# Altium PCB EE311_Charger_PCB.PcbDoc
Units mm, origin at the board's own origin, x right, y up, seen from the top; angles counter-clockwise.
Board outline 68 x 69 mm, 2 copper layers (Top Layer, Bottom Layer); 46 components, 17 nets, 117 pads, 17 vias.
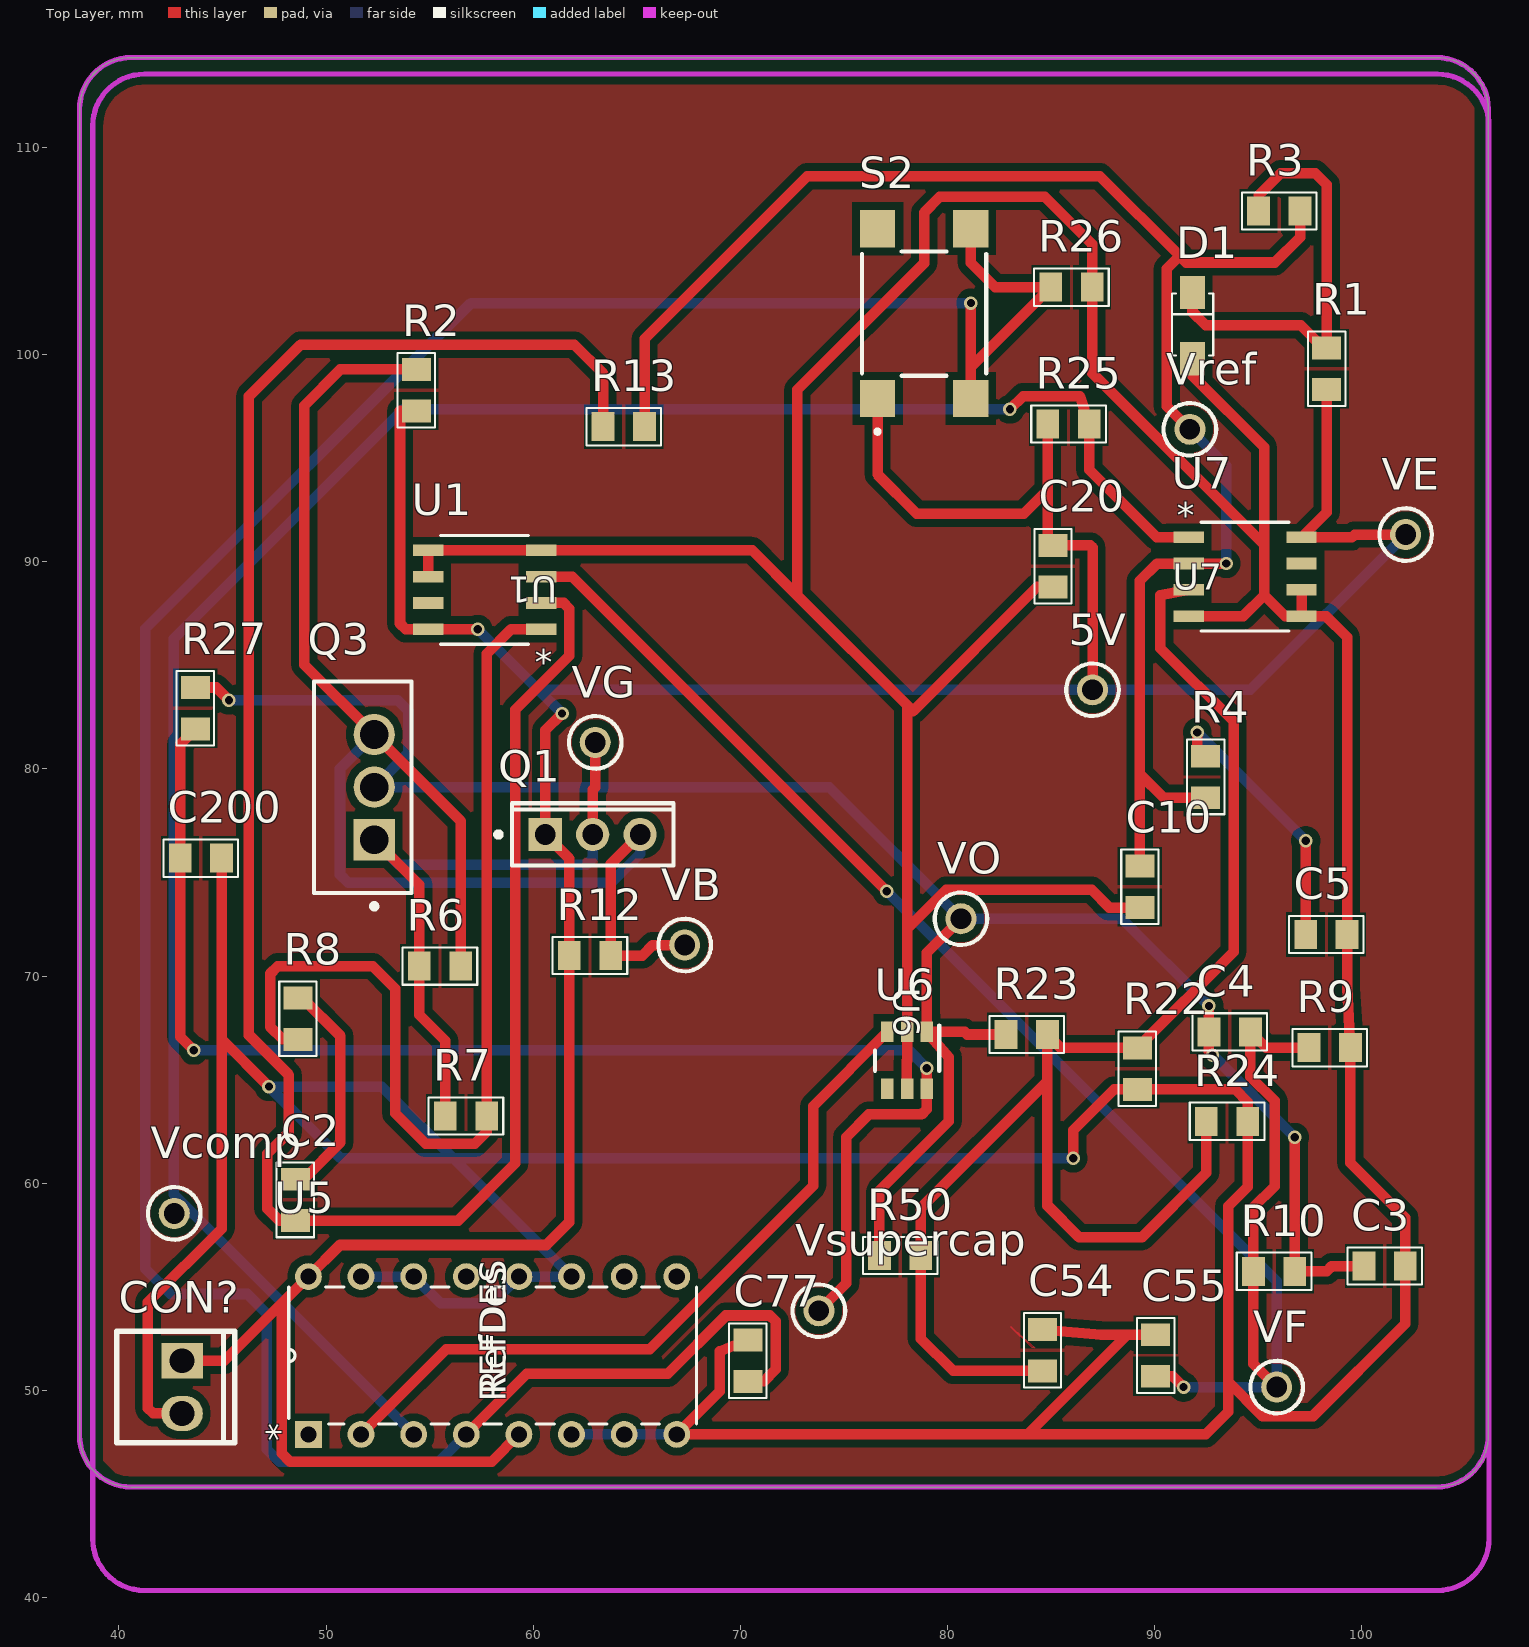
[diagram p0: Top Layer view]
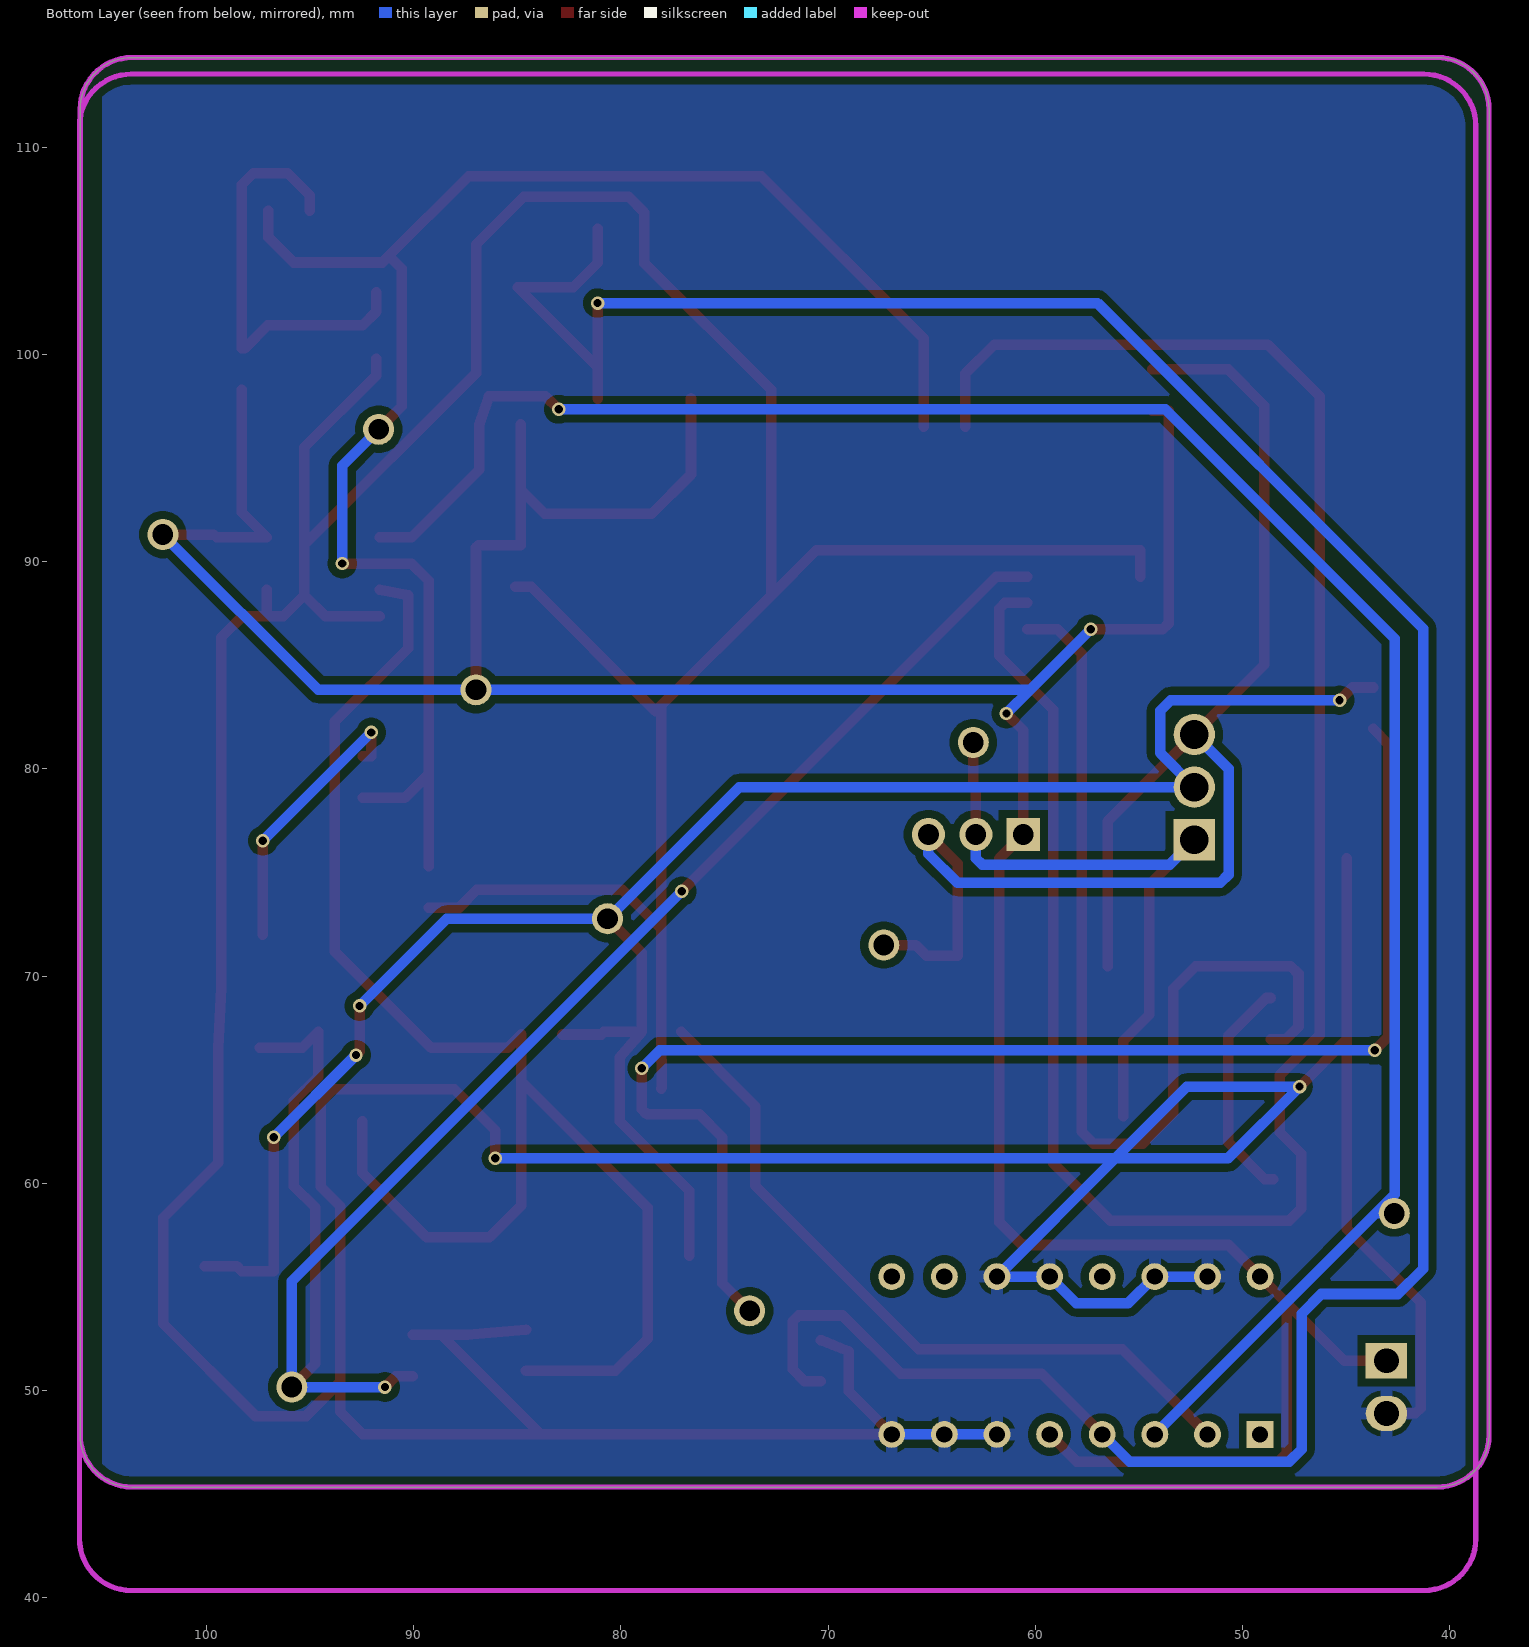
[diagram p1: Bottom Layer view, seen from below]

## Layer stack, top to bottom
Top Solder: solder mask 0.0102, Solder Resist, Dk 3.5
Top Layer: signal copper 0.0356
Dielectric 1: dielectric 0.32, FR-4, Dk 4.8
Bottom Layer: signal copper 0.0356
Bottom Solder: solder mask 0.0102, Solder Resist, Dk 3.5

## Board outline
38.1,47.839 38.1,111.839 cw(c40.6,111.839) 40.6,114.339 103.6,114.339 cw(c103.6,111.839) 106.1,111.839 106.1,47.839 cw(c103.6,47.839) 103.6,45.339 40.6,45.339 cw(c40.6,47.839)

## Design rules (kind name [scope] priority, off if disabled: settings)
BoardOutlineClearance [All] p1: gap=0.3 ignorepadtopadclearanceinfootprint=FALSE except(0.4: Arc-SplitBarrior Arc-SplitContinuation Track-SplitBarrior Track-SplitContinuation SMDPad-SplitBarrior SMDPad-SplitContinuation THPad-SplitBarrior THPad-SplitContinuation Via-SplitBarrior Via-SplitContinuation Fill-SplitBarrior Fill-SplitContinuation Poly-SplitBarrior Poly-SplitContinuation Region-SplitBarrior Region-SplitContinuation Text-SplitBarrior Text-SplitContinuation)
Clearance [All] p1: gap=0.381 ignorepadtopadclearanceinfootprint=TRUE
Height [All] p1: minheight=0 maxheight=50 prefheight=12.7
HoleSize [All] p1: absolutevalues=TRUE maxlimit=12 minlimit=0.25 maxpercent=80.000 minpercent=20.000
MinimumAnnularRing [All] p1: minimumring=0.13
MinimumSolderMaskSliver [All] p1: minsoldermaskwidth=0.1
PolygonConnect PolygonConnect_RShunt [InComponent('R5')] p1: connectstyle=Direct reliefconductorwidth=0.508 reliefentries=4 polygonreliefangle="90 Angle" airgapwidth=0.254
PolygonConnect [All] p2: connectstyle=Relief reliefconductorwidth=0.6 reliefentries=4 polygonreliefangle="90 Angle" airgapwidth=0.254
RoutingCorners [All] p1: cornerstyle=Round minsetback=2.54 maxsetback=2.54
RoutingVias [All] p1: holewidth=0.4 width=0.65 viastyle="Through Hole" minholewidth=0.25 minwidth=0.4 maxholewidth=1 maxwidth=2
SilkToSilkClearance [All] p1: silktosilkclearance=0.1
SilkToSolderMaskClearance [IsPad] p1: minsilkscreentomaskgap=0.1 clearancetoexposedcopper=TRUE
SolderMaskExpansion [All] p1: expansion=0.102 istentingtop=FALSE
SupplyNets "Schematic Supply Nets_9" [InNet('vbin')] p1: voltage=0.000
SupplyNets "Schematic Supply Nets_8" [InNet('VOUT')] p2: voltage=0.000
SupplyNets "Schematic Supply Nets_5" [InNet('vbout')] p3: voltage=0.000
SupplyNets "Schematic Supply Nets_4" [InNet('NEGATIVE')] p4: voltage=0.000
SupplyNets "Schematic Supply Nets_2" [InNet('opampOUT')] p5: voltage=0.000
SupplyNets "Schematic Supply Nets_1" [InNet('POSITIVE')] p6: voltage=0.000
SupplyNets "Schematic Supply Nets_6" [InNet('vref')] p7: voltage=0.000
SupplyNets "Schematic Supply Nets_3" [InNet('GND')] p8: voltage=0.000
SupplyNets "Schematic Supply Nets" [InNet('5V')] p9: voltage=0.000
Width [All] p1: maxlimit=10.16 minlimit=0.127 preferedwidth=0.508
24 further rules are at their usual default settings.

## Components (designator, comment, footprint, x,y, rotation, side; value= is the part's Value field where it differs from the comment)
5V "5003" TP_TH 86.995,83.82 r0 top
C2 "0.0000000033" "0805 CAP" 48.514,59.198 r90 top
C3 "0.0001" "0805 CAP" 101.092,56.007 r0 top
C4 "0.00000033" "0805 CAP" 93.615,67.31 r0 top
C5 "1100" "0805 RES" 98.282,72.009 r0 top
C10 "0.000001" "0805 CAP" 89.281,74.311 r270 top
C20 "0.000001" "0805 CAP" 85.09,89.789 r270 top
C54 "0.0001" "0805 CAP" 84.582,51.943 r90 top
C55 "0.0001" "0805 CAP" 90.043,51.689 r90 top
C77 "0.0001" "0805 CAP" 70.358,51.435 r90 top
C200 "0.0001" "0805 CAP" 43.958,75.692 r0 top
CON? "HDR2X1" HDR2X1_2P54 43.053,51.435 r0 top
D1 "BZT52H-B4V7" SOD123 91.821,101.447 r90 top
Q1 "BD140" ONSC-TO-225-3-77-09 62.869,76.835 r90 top
Q3 "IRF4905" IFX-PG-TO220-3-904-1 52.324,79.121 r90 top
R1 "330" "0805 RES" 98.298,99.314 r270 top
R2 "2.2" "0805 RES" 54.356,98.282 r90 top
R3 "3900" "0805 RES" 96.012,106.934 r0 top
R4 "3300" "0805 RES" 92.456,79.613 r90 top
R6 "100000" "0805 RES" 55.499,70.485 r180 top
R7 "1200" "0805 RES" 56.753,63.246 r0 top
R8 "10000" "0805 RES" 48.641,67.945 r90 top
R9 "1000" "0805 RES" 98.441,66.548 r180 top
R10 "1000" "0805 RES" 95.758,55.753 r0 top
R12 "1.8" "0805 RES" 62.738,70.993 r0 top
R13 "1200" "0805 RES" 64.373,96.52 r0 top
R22 "1000" "0805 RES" 89.154,65.532 r90 top
R23 "1000" "0805 RES" 83.82,67.183 r0 top
R24 "1000" "0805 RES" 93.488,62.992 r180 top
R25 "1000" "0805 RES" 85.836,96.647 r180 top
R26 "1000" "0805 RES" 85.979,103.251 r180 top
R27 "2" "0805 RES" 43.688,82.931 r270 top
R50 "1000" "0805 RES" 77.708,56.515 r180 top
S2 "SWT0315-065025GSA_REVA" SW_SWT0315-065025GSA_REVA 78.867,101.981 r90 top
U1 "TLV9162IDR" SOIC8_D_TEX 57.658,88.646 r180 top
U5 "CD4043BE" N16 66.929,55.499 r90 top
U6 "TPS22917DBVR" DBV0006_N 78.044,65.935 r270 top
U7 "TLV9162IDR" SOIC8_D_TEX 94.361,89.281 r0 top
VB "5003" TP_TH 67.31,71.501 r0 top
Vcomp "5003" TP_TH 42.672,58.547 r90 top
VE "5003" TP_TH 102.108,91.313 r0 top
VF "5003" TP_TH 95.885,50.165 r0 top
VG "5003" TP_TH 62.992,81.28 r0 top
VO "5003" TP_TH 80.645,72.771 r0 top
Vref "5003" TP_TH 91.694,96.393 r90 top
Vsupercap "5003" TP_TH 73.787,53.848 r90 top

## Footprints (in the part's own frame and the unit in brackets; to place one, negate y for a bottom-side part, rotate by r counter-clockwise, add the part's x,y. Pads: shape width x height; smd on the part's side, far side on the other; paste and mask are expansions set on the pad)
"0805 CAP" [mm] "http://www.digikey.co.nz/Web%20Export/Supplier%20Content/Vishay_8026/PDF/VishayBeyschlag_SolderPad.pdf?redirected=1 with dimension G modified by +0.25mm"
  rect 1.1x1.4 smd: 1(-1,0) 2(1,0)
  silkscreen extent -1.8,-0.9 1.8,0.9, body extent -1.04,-0.66 1.04,0.66, height 0.61
"0805 RES" [mm] "http://www.digikey.co.nz/Web%20Export/Supplier%20Content/Vishay_8026/PDF/VishayBeyschlag_SolderPad.pdf?redirected=1 with dimension G modified by +0.25mm"
  rect 1.1x1.4 smd: 1(-1,0) 2(1,0)
  silkscreen extent -1.8,-0.9 1.8,0.9, body extent -1.04,-0.66 1.04,0.66, height 0.61
DBV0006_N [mm]
  rect 1x0.6 smd paste+0 mask+0: 1(-1.375,0.95) 2(-1.375,0) 3(-1.375,-0.95) 4(1.375,-0.95) 5(1.375,0) 6(1.375,0.95)
  silkscreen extent -1.67,-1.55 0.5,1.55
HDR2X1_2P54 [mm]
  rect 2x1.7 hole 1.2: 1(0,0)
  oval 2x1.7 hole 1.2: 2(0,-2.54)
  silkscreen extent -3.16,-3.96 2.54,1.42, body extent -3.3,-3.64 3.18,1.44, height 10.09
IFX-PG-TO220-3-904-1 [mm] "TO,flange mount,2.54 mm pitch, 3 pin, 10.16 mm L X 4.57 mm W X 20.56 mm H body"
  rect 1.99x1.99 hole 1.39 paste-2539.97 mask+0: 1(-2.54,0)
  round 1.99 hole 1.39 paste-2539.97 mask+0: 2(0,0) 3(2.54,0)
  silkscreen extent -5.87,-1.8 5.1,2.9, body extent -5.16,-1.72 5.16,2.86, height 19.84
N16 [mil]
  rect 51x51 / inner round 60 / far side rect 51x51 hole 31 paste-99999 mask-25.5: 1(-300,700)
  round 51 / inner round 60 / far side round 51 hole 31 paste-99999 mask-25.5: 2(-300,600) 3(-300,500) 4(-300,400) 5(-300,300) 6(-300,200) 7(-300,100) 8(-300,0) 9(0,0) 10(0,100) 11(0,200) 12(0,300) 13(0,400) 14(0,500) 15(0,600) 16(0,700)
  silkscreen extent -280,-38 -20,738, body extent -310,-30 10,745, height 205
ONSC-TO-225-3-77-09 [mm] "FM, 3-Leads, Body 7.8x3mm, Pitch 2.29mm"
  rect 1.6x1.6 hole 1: 1(0,2.29)
  round 1.6 hole 1: 2(0,0) 3(0,-2.29)
  silkscreen extent -1.49,-3.9 1.51,4.67, body extent -1.49,-3.9 1.51,3.9, height 13.64
SOD123 [mm] "SOD-123; 2 Leads; Body 2.7 x 1.6 mm, (LxW)"
  rect 1.6x1.2 smd: 1(-1.65,0) 2(1.55,0)
  silkscreen extent -1.5,-1 1.5,1, body extent -1.8,-0.86 1.8,0.86, height 1.21
SOIC8_D_TEX [mil]
  rect 57.5x22 smd paste+0 mask+0: 1(-107.25,75) 2(-107.25,25) 3(-107.25,-25) 4(-107.25,-75) 5(107.25,-75) 6(107.25,-25) 7(107.25,25) 8(107.25,75)
  silkscreen extent -84,-104 84,104, body extent -122,-99 122,99, height 69
SW_SWT0315-065025GSA_REVA [mm]
  rect 1.8x1.7 smd paste+0 mask+0.102: 1(-4.1,2.25) 2(4.1,2.25) 3(-4.1,-2.25) 4(4.1,-2.25)
  silkscreen extent -5.8,-3 3,3
TP_TH [mm] "Test Point, Through Hole, Dia 2.54mm"
  round 1.5 hole 1: 1(0,0)
  silkscreen extent -1.27,-1.27 1.27,1.27, body extent -1.27,-1.27 1.27,1.27, height 4.57

## Part data
5V VB Vcomp VE VF VG VO Vref Vsupercap: library part TestPoint, "Test Point, Orange, 1-Pin THD, RoHS", Forward Current="3 A", Forward Voltage="1.08 V", Max Operating Temperature="150 degC", Max Surge Current="80 A", Min Operating Temperature="-65 degC", Package Quantity=500, Peak Reverse Current="600 uA", ComponentLink1Description="Manufacturer URL", ComponentLink1URL=http://www.keyelco.com/, ComponentLink2Description=Datasheet, ComponentLink2URL=http://keyelco.com/userAssets/file/M65p56.pdf, DatasheetVersion=Jun-15, Diameter="5.3 mm", Height="0.25 inch", Length="9.5 mm", Mount="Through Hole", PackageDescription="1-Pin Through Hole Device, Dia 2.54 mm", PackageReference=5003, Packaging=Bulk, Pins=2, Radiation Hardening=No, REACH SVHC="No SVHC", RoHSCompliant=true, Weight="0.01 lb", Width="0.25 inch"
C2 C3 C4 C10 C20 C54 C55 C77 C200: library part CerCap_SMT_0805, "SMT ceramic capacitor 0805 size"
C5 R1 R2 R3 R4 R6 R7 R8 R9 R10 R12 R13 R22 R23 R24 R25 R26 R27 R50: library part Res_SMT_0805, "0805 resistor", ComponentLink1Description=https://nz.mouser.com/datasheet/2/315/AOA0000C304-1149620.pdf, LatestRevisionDate=17-Jul-2002, LatestRevisionNote="Re-released for DXP Platform.", PackageReference=AXIAL-0.4, Published=8-Jun-2000, Publisher="Altium Limited"
CON?: library part CMP-004-000000-7, "Header 2X1", Component Type=Connectors, Design Item ID=HDR2X1, Source=CommonSymbols_V1.SchLib
D1: library part Zener_SMT_SOD123, "SMT zener diode with SOD123 package", Manufacturer="Nexperia USA Inc.", Manufacturer Part Number=BZT52H-B4V7,115, Operating Temperature="-65°C ~ 150°C (TA)", Package / Case=SOD-123F, Supplier Part Number 1=1727-1611-1-ND, Tolerance=±2%, Category="Discrete Semiconductor Products", ComponentLink1Description=https://assets.nexperia.com/documents/data-sheet/BZT52H_SER.pdf, ComponentLink1URL=https://assets.nexperia.com/documents/data-sheet/BZT52H_SER.pdf, Mounting Type="Surface Mount", Packaging="Cut Tape (CT)", Part Status=Active, Pricing 1="1=0.51, 10=0.408, 100=0.2164, 500=0.14232, 1000=0.09678 (NZD)", RoHS="RoHS Compliant", Stock 1=0, Supplier 1=Digi-Key, Supplier Device Package=SOD-123F
Q1: library part CMP-1048-00039-1, "Plastic Medium-Power Silicon PNP Transistor, 3-Pin TO-225, Bulk Box", Manufacturer="On Semiconductor", ComponentLink1Description="Manufacturer URL", ComponentLink1URL=http://www.onsemi.com/, ComponentLink2Description=Datasheet, ComponentLink2URL=http://www.onsemi.com/pub_link/Collateral/BD136-D.PDF, ComponentLink3Description="Package Specification", ComponentLink3URL=http://www.onsemi.com/pub_link/Collateral/77-09.PDF, DatasheetVersion="Rev. 15", IC Continuous (A)=1.5, Mounting Technology="Through Hole", PackageDescription="3-Pin Flange Mount, Vertical Straight Lead, Body 7.6 x 2.7 mm, Pitch 2.29 mm", PackageReference=TO-225-3-77-09, PackageVersion="Rev. AC, 12/2013", Packing="Bulk Box", PartNumber=BD140, Polarity=PNP, RoHS=FALSE
Q3: "OptiMOS - P2 Power-Transistor, P-channel-Enhancement mode, VDS -30V", Manufacturer="Infineon Technologies", Manufacturer Order NumberManufacturer Order Number=IRF4905, PackageReference=PG-TO220-3-904
S2: "6mm x 6mm Gull Wing Tactile Switch", Package=None, Check_prices=https://www.snapeda.com/parts/SWT0315-065025GSA/Global+Connector+Technology/view-part/?ref=eda, MF="Global Connector Technology", MP=SWT0315-065025GSA, SnapEDA_Link=https://www.snapeda.com/parts/SWT0315-065025GSA/Global+Connector+Technology/view-part/?ref=snap
U1 U7: "Dual, 16V, 11MHz, rail-to-rail input and output low-offset-voltage low-noise operational amplifier 8-SOIC -40 to 125", Manufacturer_Name="Texas Instruments", Copyright="Copyright (C) 2026 Ultra Librarian. All rights reserved.", Datasheet=https://www.ti.com/lit/gpn/tlv9162, Manufacturer_Part_Number=TLV9162IDR, RefDes=RefDes, Type=Type
U5: "CMOS Quad NOR R/S Latch with 3-State Outputs 16-PDIP -55 to 125", Manufacturer_Name="Texas Instruments", Copyright="Copyright (C) 2025 Ultra Librarian. All rights reserved.", Manufacturer_Part_Number=CD4043BE, RefDes=RefDes, Type=Type
U6: "5.5-V, 2-A, 80-mÎ© , 10-nA leakage load switch adj. rise time and adj output discharge 6-SOT-23 -40 to 125", Manufacturer_Name="Texas Instruments", Copyright="Copyright (C) 2026 Ultra Librarian. All rights reserved.", Manufacturer_Part_Number=TPS22917DBVR, RefDes=RefDes, Type=TYPE

## Via types
v1: diameter 0.65, hole 0.4, Top Layer to Bottom Layer, 17 vias

## Nets (pads, with @x,y where several pads share a name; then routed paths per layer and width w, separated by ;. In a path a pad name is that pad's centre, name@x,y a point inside that pad or via, vN(x,y) a via of type N, cw(c..) or ccw(c..) an arc to the next point about the centre after c; other vN are vias at no path point)
5V: 5V.1 C20.1 CON?.1 Q1.1 R1.2 R2.1 R12.1 R25.2 S2.1 U1.8 U5.5 U5.16 U7.8 VE.1 | length 172.7
  Top Layer w0.508: CON?.1 45.085,51.435 47.854,54.204 ; R2.1 53.569,97.282 53.569,87.02 53.848,86.741 U1.8 v1(57.328,86.741) ; U5.5 57.988,46.558 48.26,46.558 47.854,46.965 47.854,54.204 ; v1(61.392,82.677) 60.579,81.864 Q1.1 61.738,75.676 R12.1 61.738,58.131 60.63,57.023 50.673,57.023 U5.16 47.854,54.204 ; S2.1 76.617,94.214 78.518,92.313 83.677,92.313 84.836,93.472 ; R25.2 84.836,93.472 ; 5V.1 86.995,90.687 86.893,90.789 C20.1 84.836,90.789 84.836,93.472 ; R1.2 98.298,92.399 U7.8 99.517,91.186 99.644,91.313 VE.1
  Bottom Layer w0.508: v1(57.328,86.741) 60.249,83.82 ; v1(61.392,82.677) 60.249,83.82 ; VE.1 94.615,83.82 5V.1 60.249,83.82
GND: C3.2 C5.2 C10.2 C20.2 C54.2 C55.2 C77.2 C200.2 CON?.2 D1.1 R9.1 R22.1 R24.1 R26.1 U1.4 U1.5 U1.6 U5.6 U5.7 U5.8 U5.11 U5.12 U5.14 U5.15 U6.2 U6.5 U7.4 U7.5 U7.6 | length 364.8
  Top Layer w0.508: CON?.2 41.656,48.895 41.402,49.149 41.402,54.254 44.958,57.81 44.958,66.954 ; C200.2 44.958,66.954 ; v1(47.244,64.668) 44.958,66.954 ; U1.6 U1.5 U1.4 70.568,90.551 72.746,88.373 ; C77.2 69.012,51.892 69.012,49.962 U5.8 83.861,47.879 ; U6.5 78.044,64.597 78.034,64.607 78.034,65.913 78.044,65.923 U6.2 78.044,72.278 ; C54.2 87.427,52.689 88.671,52.689 ; C20.2 84.328,88.789 78.329,82.79 ; v1(86.065,61.214) 86.065,62.56 88.036,64.532 R22.1 93.878,64.532 94.488,63.922 R24.1 94.488,59.842 93.548,58.903 93.548,50.419 ; C10.2 87.808,73.311 86.956,74.163 79.929,74.163 78.044,72.278 ; C55.2 88.671,52.689 ; U7.4 94.259,87.376 95.275,88.392 ; D1.1 91.821,98.984 95.275,95.529 95.275,90.814 ; U7.6 U7.5 ; 72.746,88.373 78.044,83.075 ; 72.746,88.373 72.746,98.298 78.867,104.419 78.867,106.858 79.629,107.62 84.693,107.62 86.979,105.334 R26.1 86.979,99.111 95.275,90.814 ; 78.044,72.278 78.044,82.79 ; 78.044,82.79 78.044,83.075 ; 78.044,82.79 78.329,82.79 ; 78.044,83.075 78.329,82.79 ; 83.861,47.879 92.456,47.879 93.548,48.971 93.548,50.419 ; 83.861,47.879 88.671,52.689 ; 93.548,50.419 95.199,48.768 97.638,48.768 102.092,53.222 C3.2 102.092,58.344 99.441,60.995 R9.1 99.282,69.425 C5.2 99.282,86.36 98.266,87.376 U7.5 ; 95.275,88.392 95.275,90.814 ; 95.275,88.392 96.291,87.376 U7.5
  Bottom Layer w0.508: U5.15 U5.14 55.524,54.204 58.014,54.204 U5.12 U5.11 56.134,61.214 ; U5.6 U5.7 U5.8 ; v1(86.065,61.214) 56.134,61.214 ; 56.134,61.214 50.698,61.214 v1(47.244,64.668) 52.68,64.668 56.134,61.214
NEGATIVE: C2.1 R13.1 U1.2 | length 104.4
  Top Layer w0.508: U1.2 61.468,88.011 61.747,87.732 61.747,85.471 59.131,82.855 59.131,60.96 56.369,58.198 C2.1 47.752,58.198 47.168,58.782 47.168,61.417 48.209,62.459 48.209,65.227 46.279,67.158 46.279,97.993 48.768,100.482 61.976,100.482 63.373,99.085 R13.1
NetC2_2: C2.2 R8.2 | length 10.9
  Top Layer w0.508: C2.2 48.917,60.198 50.695,61.976 50.695,67.11 48.86,68.945 R8.2
NetC5_1: C5.1 R4.2 | length 13.5
  Top Layer w0.508: v1(92.05,81.763) 92.05,80.613 R4.2 ; C5.1 v1(97.282,76.53)
  Bottom Layer w0.508: v1(92.05,81.763) v1(97.282,76.53)
NetC77_1: C77.1 R26.2 S2.3 S2.4 U5.4 | length 138.4
  Top Layer w0.508: U5.4 59.69,50.8 66.483,50.8 69.303,53.62 71.424,53.62 71.704,53.34 71.704,51.019 71.12,50.435 C77.1 ; S2.3 81.117,99.389 ; S2.4 81.117,104.43 82.296,103.251 R26.2 81.117,99.389 ; v1(81.128,102.489) 81.117,102.478 81.117,99.389
  Bottom Layer w0.508: U5.4 55.448,46.558 47.752,46.558 47.142,47.168 47.142,53.708 46.194,54.657 42.498,54.657 41.275,55.88 41.275,86.766 56.998,102.489 v1(81.128,102.489)
NetC200_1: C200.1 R27.2 U6.6 Vsupercap.1 | length 67.2
  Top Layer w0.508: v1(43.616,66.417) 42.958,67.075 C200.1 42.958,81.201 R27.2 ; Vsupercap.1 75.108,55.169 75.108,62.23 76.2,63.322 78.74,63.322 78.994,63.576 U6.6 v1(78.994,65.557)
  Bottom Layer w0.508: v1(43.616,66.417) 78.135,66.417 v1(78.994,65.557)
NetD1_2: D1.2 R1.1 R3.1 | length 20.8
  Top Layer w0.508: D1.2 91.821,102.057 92.456,101.422 97.037,101.422 98.146,100.314 R1.1 98.298,108.204 97.739,108.763 96.079,108.763 95.012,107.696 R3.1
NetQ1_2: Q1.2 Q3.1 R6.2 R7.1 VG.1 | length 31.6
  Top Layer w0.508: Q3.1 54.499,74.406 R6.2 54.499,68.132 55.753,66.878 R7.1 ; Q1.2 62.869,78.994 62.992,79.117 VG.1
  Bottom Layer w0.508: Q3.1 53.518,75.387 62.564,75.387 62.869,75.692 Q1.2
NetQ1_3: Q1.3 Q3.3 R2.2 R6.1 R12.2 VB.1 | length 70.1
  Top Layer w0.508: R2.2 50.692,99.282 48.946,97.536 48.946,85.039 Q3.3 56.499,77.486 R6.1 ; Q1.3 63.738,75.414 R12.2 65.253,70.993 65.761,71.501 VB.1
  Bottom Layer w0.508: Q3.3 50.673,80.01 50.673,74.905 51.079,74.498 63.754,74.498 65.159,75.903 Q1.3
NetU5_2: U5.2 U6.3 | length 35.7
  Top Layer w0.508: U5.2 55.804,51.994 65.619,51.994 73.508,59.883 73.508,63.724 U6.3
opampOUT: R7.2 R8.1 U1.1 | length 48.3
  Top Layer w0.508: R8.1 47.914,66.945 47.295,67.564 47.295,70.104 47.676,70.485 52.248,70.485 53.34,69.393 53.34,63.373 54.813,61.9 57.169,61.9 57.753,62.484 R7.2 57.753,85.566 58.928,86.741 U1.1
POSITIVE: C4.2 C55.1 R9.2 R10.1 U1.3 VF.1 | length 82.4
  Top Layer w0.508: U1.3 61.874,89.281 v1(77.064,74.092) ; C55.1 90.865,50.689 v1(91.389,50.165) ; VF.1 94.758,51.292 R10.1 94.758,58.842 95.783,59.868 95.783,63.983 94.615,65.151 C4.2 95.377,66.548 R9.2
  Bottom Layer w0.508: v1(77.064,74.092) 95.885,55.27 VF.1 v1(91.389,50.165)
vbin: C54.1 R22.2 R23.2 R24.2 R50.1 U7.3 | length 73
  Top Layer w0.508: C54.1 80.264,50.943 78.708,52.499 R50.1 78.708,58.81 84.82,64.922 ; U7.3 90.272,88.392 90.272,85.827 93.802,82.296 93.802,71.18 R22.2 85.471,66.532 R23.2 84.82,64.922 ; R24.2 92.488,60.509 89.383,57.404 86.344,57.404 84.82,58.928 84.82,64.922
vbout: R25.1 U5.3 U7.1 Vcomp.1 | length 102.4
  Top Layer w0.508: v1(83.007,97.358) 83.642,97.993 86.379,97.993 R25.1 86.836,94.444 90.094,91.186 U7.1
  Bottom Layer w0.508: Vcomp.1 43.561,58.547 ; U5.3 43.561,58.547 ; v1(83.007,97.358) 53.721,97.358 42.647,86.284 42.647,59.461 43.561,58.547
VOUT: C3.1 C4.1 Q3.2 R10.2 R23.1 R27.1 R50.2 U6.1 VO.1 | length 100.4
  Top Layer w0.508: R27.1 44.695,83.931 v1(45.314,83.312) ; R50.2 76.708,59.637 80.063,62.992 80.063,66.075 U6.1 ; VO.1 78.994,71.12 U6.1 ; R23.1 80.95,67.183 80.823,67.31 U6.1 ; v1(92.615,68.561) C4.1 92.615,66.364 v1(92.786,66.192) ; v1(96.758,62.221) R10.2 98.298,55.753 98.552,56.007 C3.1
  Bottom Layer w0.508: v1(45.314,83.312) 53.467,83.312 53.975,82.804 53.975,80.772 Q3.2 74.295,79.121 VO.1 88.405,72.771 v1(92.615,68.561) ; v1(92.786,66.192) v1(96.758,62.221)
VREF: C10.1 R3.2 R4.1 R13.2 U7.2 Vref.1 | length 80.8
  Top Layer w0.508: R13.2 65.373,100.755 73.228,108.61 87.351,108.61 91.199,104.762 ; C10.1 89.281,79.756 ; Vref.1 90.576,97.511 90.576,104.14 91.199,104.762 ; R4.1 90.424,78.613 89.281,79.756 ; v1(93.447,89.916) U7.2 90.119,89.916 89.281,89.078 89.281,79.756 ; R3.2 97.012,105.664 95.793,104.445 91.516,104.445 91.199,104.762
  Bottom Layer w0.508: Vref.1 93.447,94.64 v1(93.447,89.916)
pads on no net: S2.2 U1.7 U5.1 U5.9 U5.10 U5.13 U6.4 U7.7

## Polygon pours and split planes (outlines as drawn)
no net on Top Layer "NONET_L01_P001" (solid, pour order 1): 38.474,113.665 104.013,113.665 105.41,112.268 105.41,45.72 40.132,45.72 38.1,47.752
no net on Top Layer "NONET_L01_P002" (solid, pour order 2): 84.201,52.07 84.074,52.07 83.058,53.086
GND on Bottom Layer "GND_L02_P000" (solid, pour order 0): 38.862,113.284 105.029,113.284 105.029,45.847 39.751,45.847 38.608,46.99 38.608,55.245

## Keep-outs
Keep-Out Layer:
  lines w0.254: 38.1,47.839 ccw(c40.6,47.839) 40.6,45.339 103.6,45.339 ccw(c103.6,47.839) 106.1,47.839 106.1,111.839 ccw(c103.6,111.839) 103.6,114.339 40.6,114.339 ccw(c40.6,111.839) 38.1,111.839 38.1,47.839 ; 38.735,42.847 ccw(c41.235,42.847) 41.235,40.347 103.632,40.347 ccw(c103.632,42.847) 106.132,42.847 106.132,111.038 ccw(c103.632,111.038) 103.632,113.538 41.235,113.538 ccw(c41.235,111.038) 38.735,111.038 38.735,42.847

## Text inside footprints (layer, text, board x,y; h text height)
U1: Top Overlay "*" at 60.954,86.309 h1.27 r180; Top 3D Body "*" at 59.588,87.49 h1.27 r180
U5: Top Overlay "*" at 48.374,47.561 h1.27 r90; Top Overlay "RefDes" at 58.674,49.784 h1.27 r90; Top Overlay "REFDES" at 58.674,49.466 h1.27 r90; Top 3D Body "*" at 49.149,47.625 h1.27 r90; Top 3D Body "RefDes2" at 58.674,49.466 h1.27 r90
U7: Top Overlay "*" at 91.065,91.618 h1.27; Top 3D Body "*" at 92.431,90.437 h1.27